# EAGLE board Board-TODO (EAGLE 9.1.3)

Size 160 x 100 mm. Coordinates in mm from the lower left corner, seen from the top.
Outline: 0,0 160,0 160,100 0,100 0,0
Copper layers (1*16): Top 0.035mm / dielectric 1.5mm / Bottom 0.035mm
Design rules "default": minimum track width 6mil, minimum drill 0.35mm, track to track 6mil, track to pad 6mil, pad to pad 6mil, via to via 6mil, smd to smd 6mil, copper to edge 40mil, drill to drill 6mil, minimum pad ring 10mil, minimum via ring 8mil, stop-mask expansion 4mil, vias tented up to drill 0mil, thermal gap 10mil

## Footprints (pad centres in the part's own frame; a part is rotated, then mirrored left to right if it is on the bottom)
DO35-7 = drill 0.813 long: A 3.81,0; C -3.81,0
1X04 = drill 1.016 long: 1 -3.81,0; 2 -1.27,0; 3 1.27,0; 4 3.81,0
ARDUINO2009 = drill 1.016 long: 1 33.02,2.54; 2 35.56,2.54; 3 38.1,2.54; 4 40.64,2.54; 5 43.18,2.54; 6 45.72,2.54; 7 50.8,2.54; 8 53.34,2.54; 9 55.88,2.54; 10 58.42,2.54; 11 60.96,2.54; 12 63.5,2.54; 13 63.5,50.8; 14 60.96,50.8; 15 58.42,50.8; 16 55.88,50.8; 17 53.34,50.8; 18 50.8,50.8; 19 48.26,50.8; 20 45.72,50.8; 21 41.656,50.8; 22 39.116,50.8; 23 36.576,50.8; 24 34.036,50.8; 25 31.496,50.8; 26 28.956,50.8; 27 26.416,50.8; 28 23.876,50.8 | hole 3.2: 15.24,50.8; 66.04,35.56; 66.04,7.62 | hole 2: 55.17,27.114
1X02 = drill 1.016 long: 1 -1.27,0; 2 1.27,0
308-100 = drill 0.26 pad 0.8 long: NEG -5.5,-2.119; POS -5.5,2.119
0204V = drill 0.813 octagon: 1 -1.27,0; 2 1.27,0
1X06 = drill 1.016 long: 1 -6.35,0; 2 -3.81,0; 3 -1.27,0; 4 1.27,0; 5 3.81,0; 6 6.35,0
1X03 = drill 1.016 long: 1 -2.54,0; 2 0,0; 3 2.54,0

## Placement (x,y rotation side)
D1  [DO35-7]  63.5,115.57 0 top  (outside the outline)
D3  [DO35-7]  40.64,115.57 0 top  (outside the outline)
D10  [DO35-7]  29.21,115.57 0 top  (outside the outline)
HM-10-BLUETOOTH  [1X04]  46.99,110.49 0 top  (outside the outline)
IC1  [ARDUINO2009]  0,0 0 top
IC2  [ARDUINO2009]  0,54.61 0 top
LED1  [1X02]  -6.35,110.49 0 top  (outside the outline)
LED2  [1X02]  -12.7,110.49 0 top  (outside the outline)
M1  308-100  [308-100]  -5.08,58.42 0 top  (outside the outline)
M2  308-100  [308-100]  -16.51,58.42 0 top  (outside the outline)
R1  [0204V]  21.59,115.57 0 top  (outside the outline)
R2  [0204V]  16.51,115.57 0 top  (outside the outline)
RELAY-CONTROL  [1X06]  60.96,110.49 0 top  (outside the outline)
RELAY-OUPUT-A  [1X03]  36.83,110.49 0 top  (outside the outline)
RELAY-OUTPUT-B  [1X03]  27.94,110.49 0 top  (outside the outline)
RELAY-OUTPUT-C  [1X03]  19.05,110.49 0 top  (outside the outline)
RELAY-OUTPUT-D  [1X03]  10.16,110.49 0 top  (outside the outline)
SERVO-CONTROL  [1X03]  1.27,110.49 0 top  (outside the outline)

## Library data of the parts
D1 D3 D10 = diode
HM-10-BLUETOOTH LED1 LED2 RELAY-CONTROL RELAY-OUPUT-A RELAY-OUTPUT-B RELAY-OUTPUT-C RELAY-OUTPUT-D SERVO-CONTROL = pinhead
IC1 IC2 = arduino
M1 M2 = motor; PRECISION_MICRODRIVES: 308-100
R1 R2 = resistor

## Nets
+3V3: IC2.2
+5V: D1.A D1.C IC2.3 IC2.6 RELAY-OUPUT-A.1 RELAY-OUTPUT-B.1 RELAY-OUTPUT-C.1 RELAY-OUTPUT-D.1
GND: IC1.27 IC2.4 IC2.27 RELAY-OUPUT-A.3 RELAY-OUTPUT-B.3 RELAY-OUTPUT-D.3
N$1: M1.POS RELAY-OUPUT-A.2
N$2: M2.POS RELAY-OUTPUT-C.2
N$3: D3.C RELAY-CONTROL.1
N$4: IC1.15 RELAY-CONTROL.2
N$5: IC1.16 RELAY-CONTROL.3
N$6: IC1.17 RELAY-CONTROL.4
N$7: IC1.18 RELAY-CONTROL.5
N$8: D3.A IC1.3
N$9: IC2.16 R1.1
N$10: M1.NEG RELAY-OUTPUT-B.2
N$11: IC2.24 SERVO-CONTROL.1
N$12: D10.C IC1.5
N$13: IC2.25 SERVO-CONTROL.2
N$15: IC2.26 SERVO-CONTROL.3
N$16: HM-10-BLUETOOTH.1 IC1.2
N$17: D10.A RELAY-CONTROL.6
N$18: HM-10-BLUETOOTH.2 IC1.13 IC2.13
N$19: HM-10-BLUETOOTH.4 IC1.4
N$20: HM-10-BLUETOOTH.3 IC1.14 IC2.14
N$21: LED1.1 R1.2
N$22: IC2.5 LED1.2 LED2.2
N$23: LED2.1 R2.2
N$24: IC2.20 R2.1
RELAY-OUTPUT-D: M2.NEG RELAY-OUTPUT-D.2

## Tracks (layer width: path | path; a pad name or v marks a point on that pad's centre or on a via)
+5V  (7 unrouted)
GND  (5 unrouted)
N$1  (1 unrouted)
N$2  (1 unrouted)
N$3  (1 unrouted)
N$4  (1 unrouted)
N$5  (1 unrouted)
N$6  (1 unrouted)
N$7  (1 unrouted)
N$8  (1 unrouted)
N$9  (1 unrouted)
N$10  (1 unrouted)
N$11  (1 unrouted)
N$12  (1 unrouted)
N$13  (1 unrouted)
N$15  (1 unrouted)
N$16  (1 unrouted)
N$17  (1 unrouted)
N$18  (2 unrouted)
N$19  (1 unrouted)
N$20  (2 unrouted)
N$21  (1 unrouted)
N$22  (2 unrouted)
N$23  (1 unrouted)
N$24  (1 unrouted)
RELAY-OUTPUT-D  (1 unrouted)